# Altium PCB MergeBoard3.PcbDoc
Units mil, origin at the board's own origin, x right, y up, seen from the top; angles counter-clockwise.
Board outline 3000 x 3000 mil, 4 copper layers (Top Layer, Internal Plane 1, Internal Plane 2, Bottom Layer); 114 components, 68 nets, 382 pads, 119 vias.
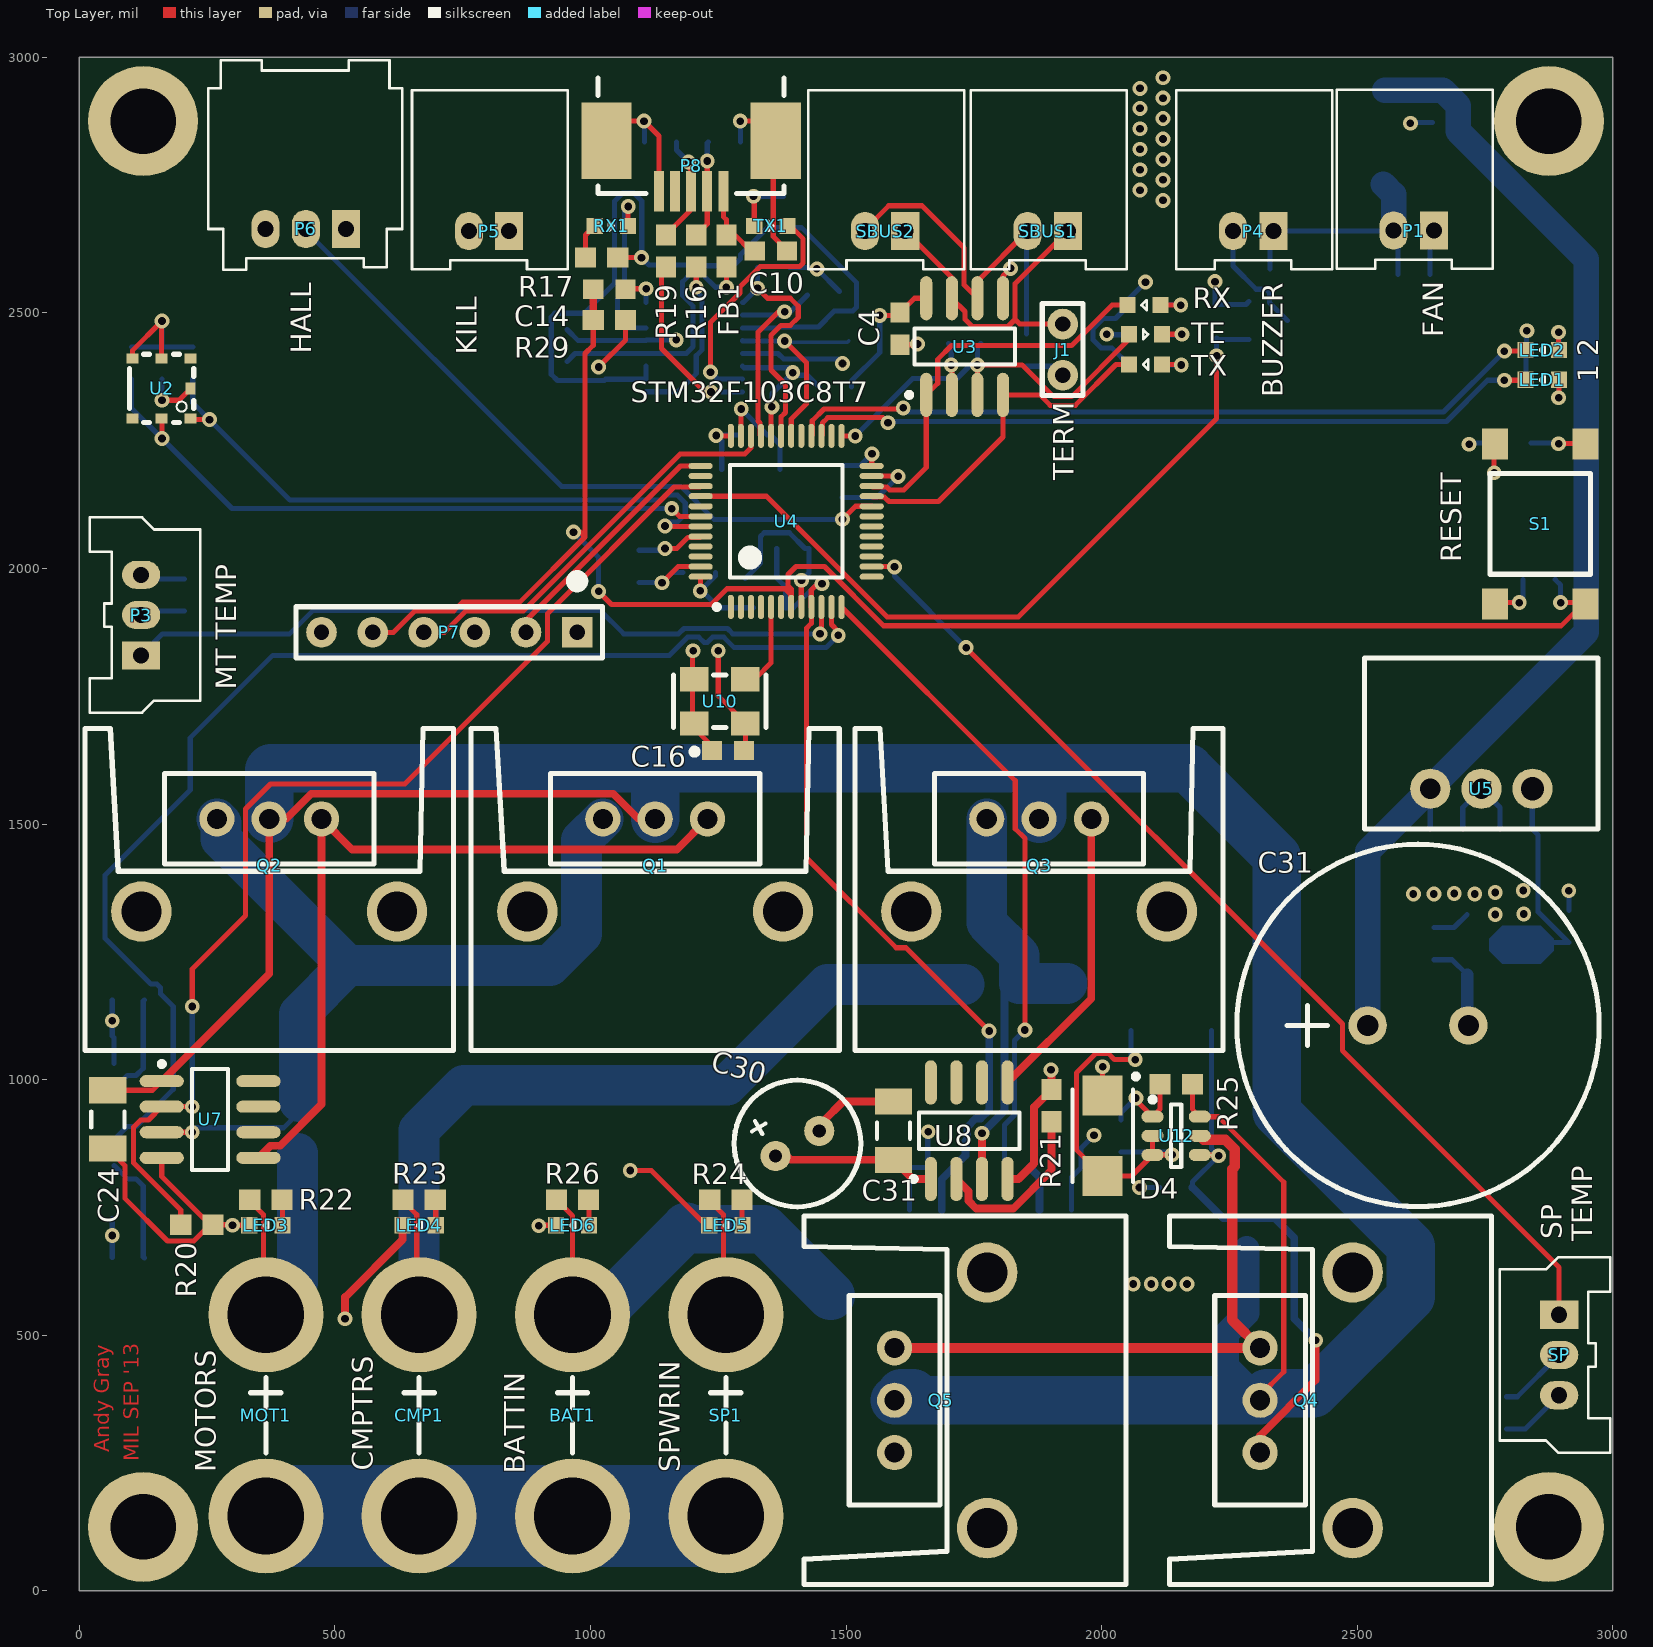
[diagram p0: Top Layer view]
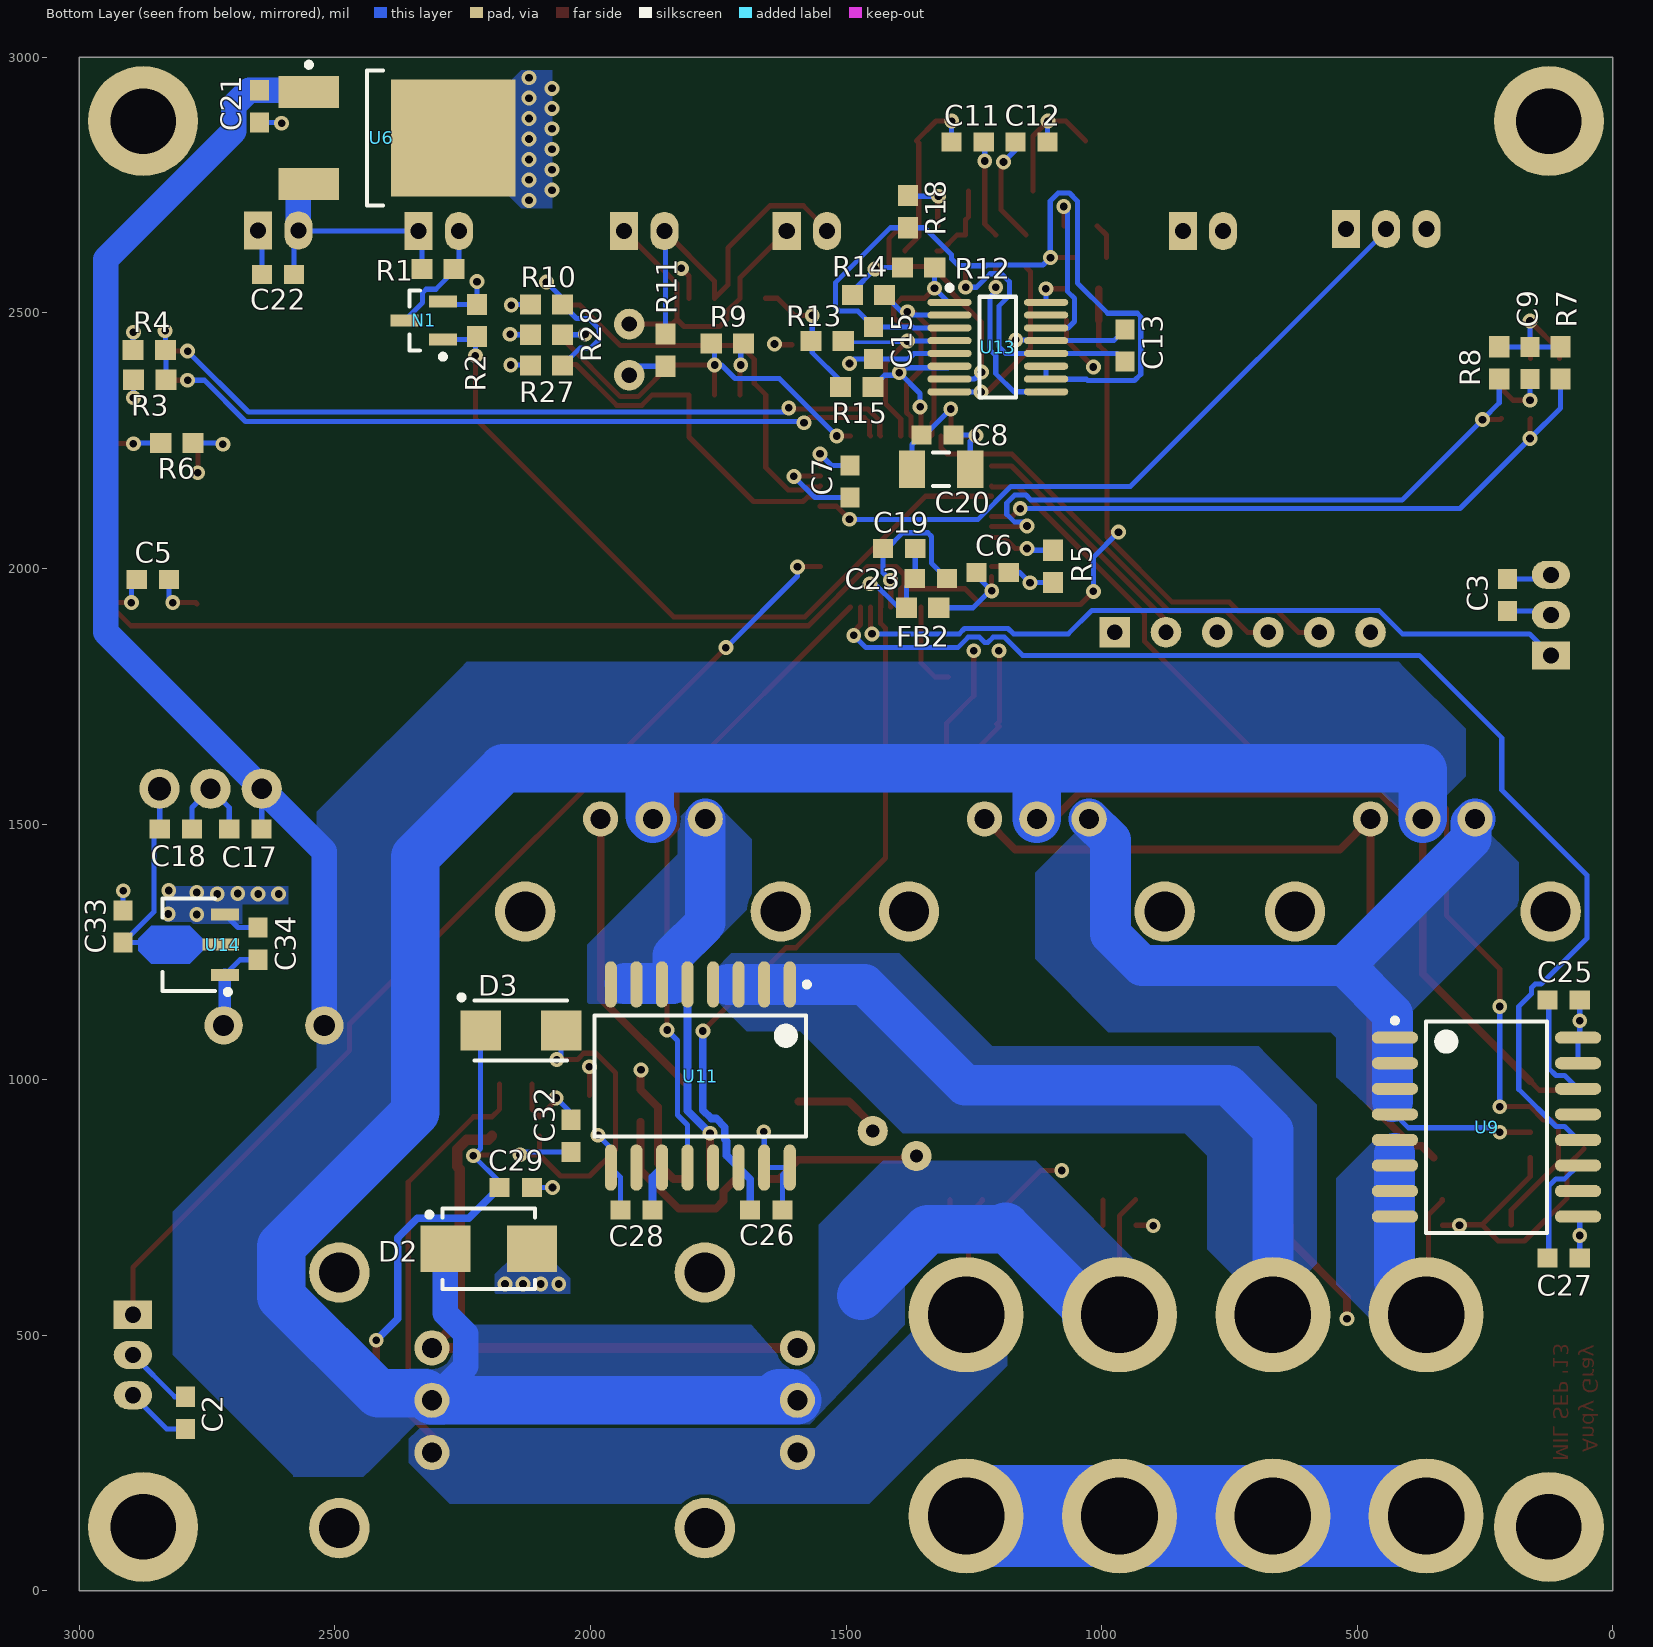
[diagram p1: Bottom Layer view, seen from below]
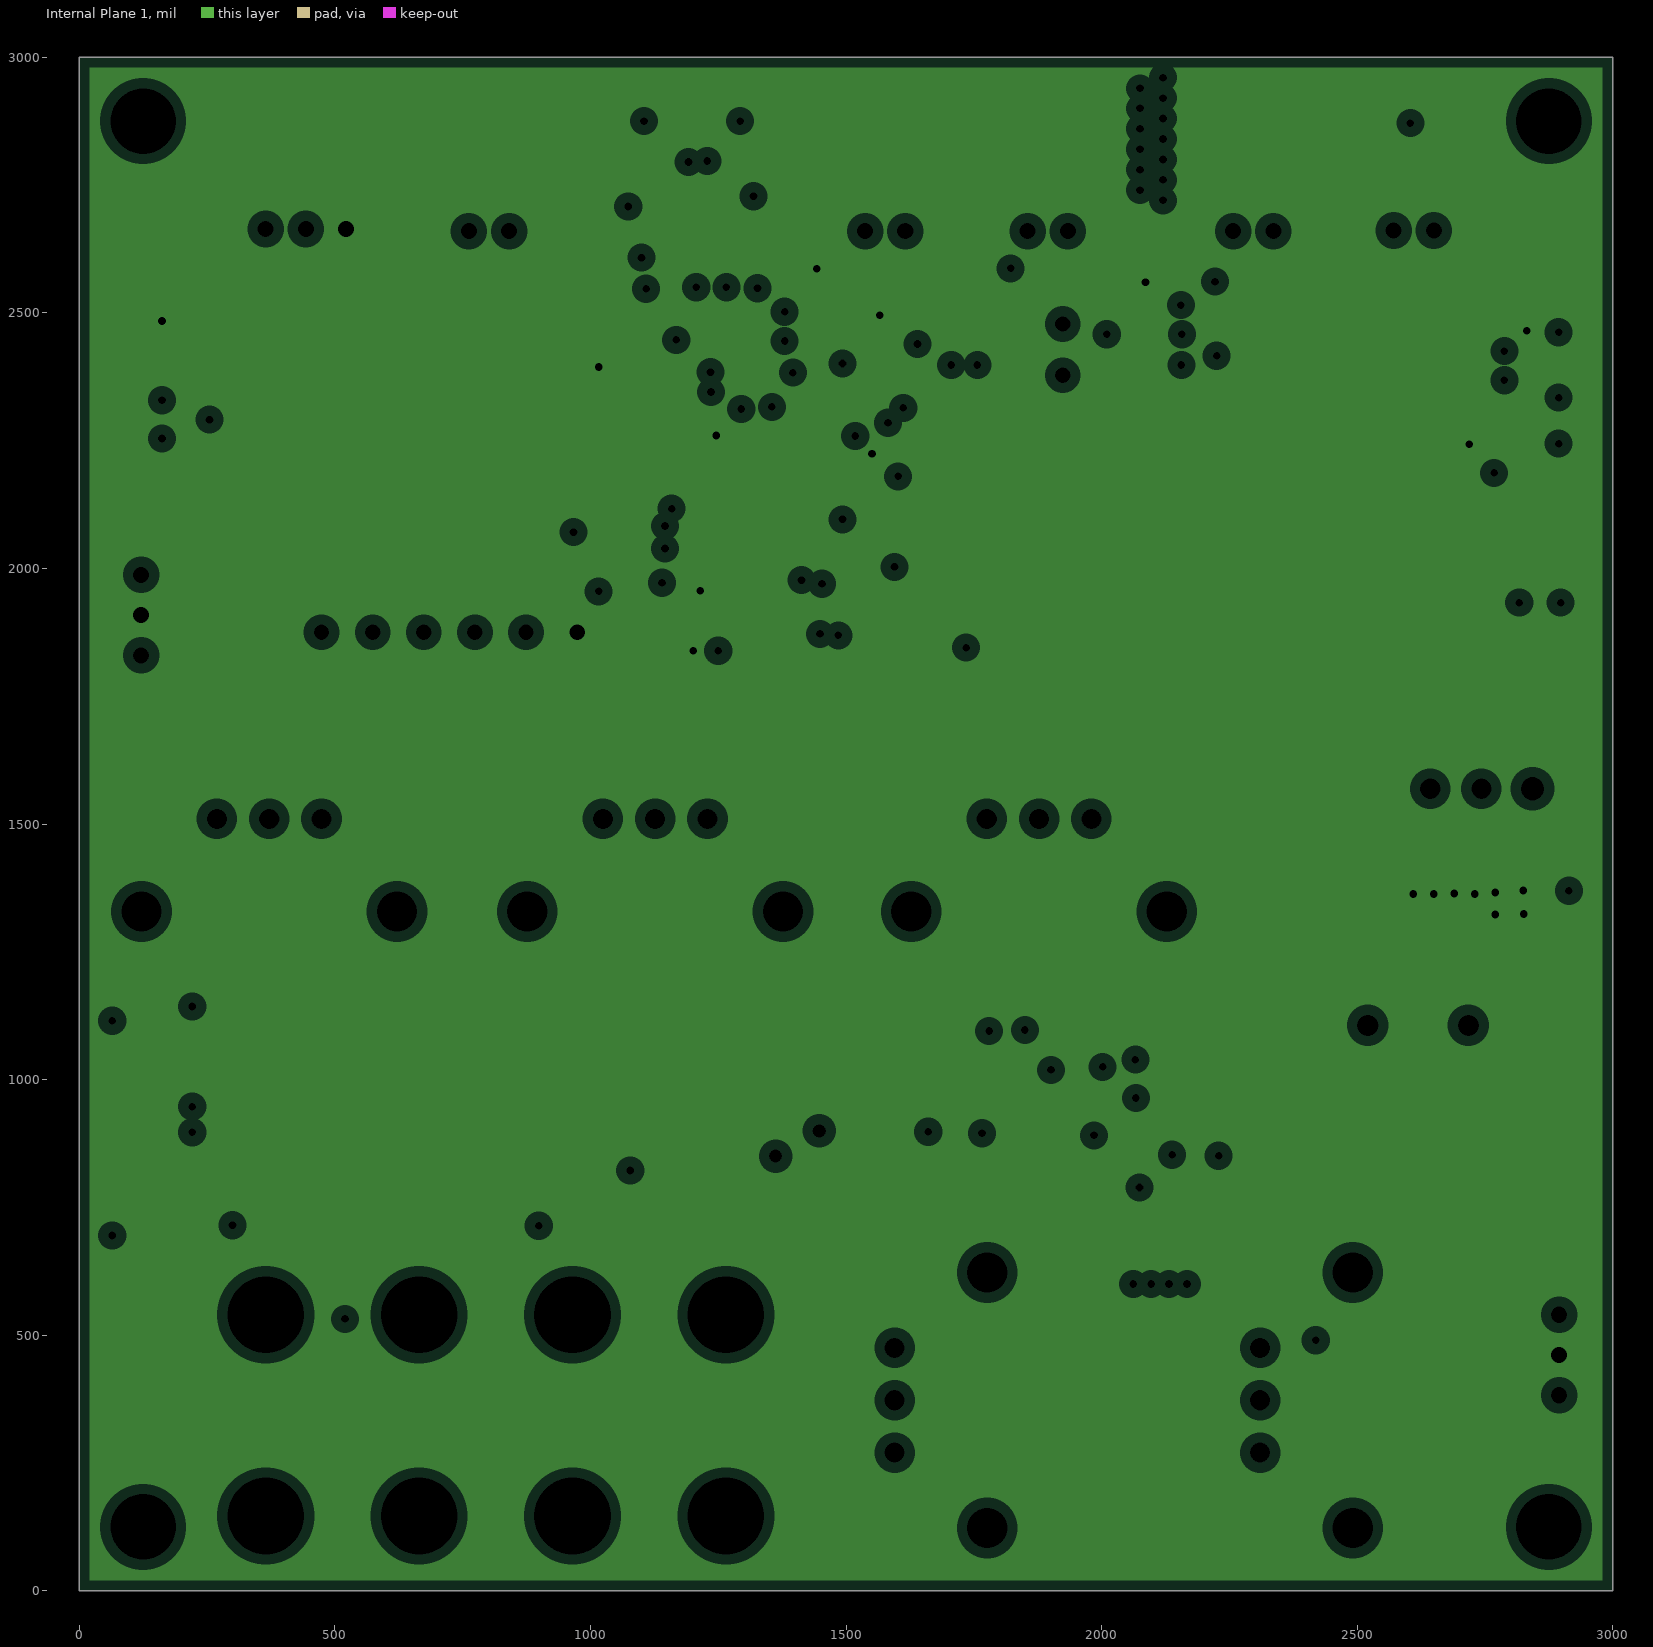
[diagram p2: Internal Plane 1, clearances drawn from the general rule]
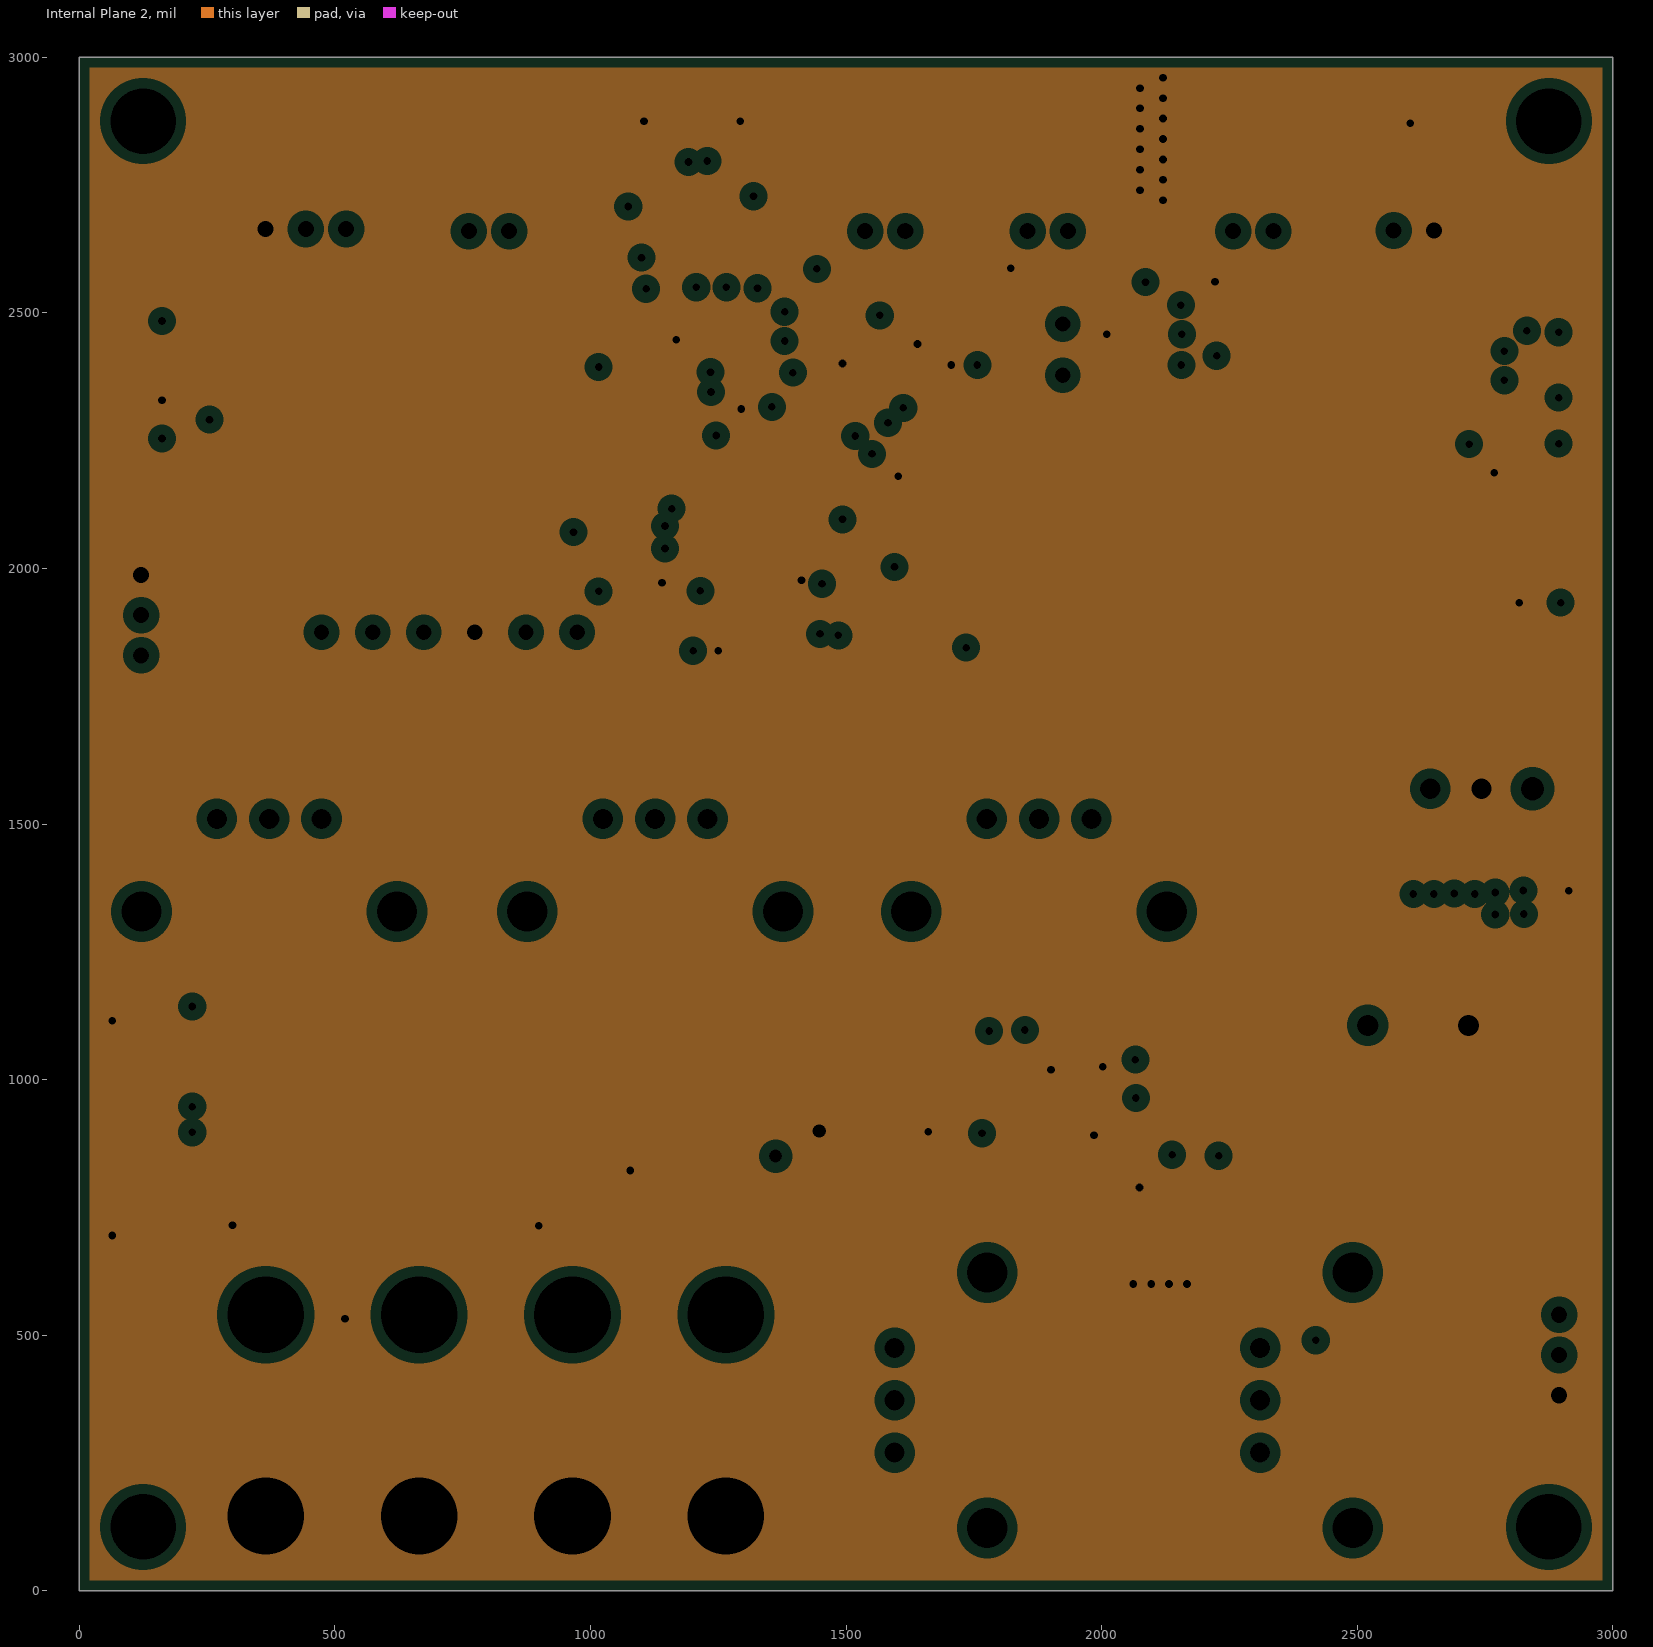
[diagram p3: Internal Plane 2, clearances drawn from the general rule]

## Layer stack, top to bottom
Top Layer: signal copper 1.4
Dielectric: core 12.6, FR-4, Dk 4.8
Internal Plane 1: plane copper 1.4, net 3V3
Dielectric: prepreg 12.6, FR-4, Dk 4.8
Internal Plane 2: plane copper 1.4, net GND
Dielectric: core 12.6, FR-4, Dk 4.8
Bottom Layer: signal copper 1.4

## Board outline
0,0 3000,0 3000,3000 0,3000

## Design rules (kind name [scope] priority, off if disabled: settings)
Clearance [All] p1: gap=7
Height [All] p1: minheight=0 maxheight=1500 prefheight=500
HoleSize [All] p1: absolutevalues=TRUE maxlimit=150 minlimit=15 maxpercent=80.000 minpercent=20.000
PlaneClearance [All] p1: clearance=20
PlaneConnect [All] p1: planeconnectstyle=Direct reliefexpansion=20 reliefentries=4 reliefconductorwidth=10 reliefairgap=10
PolygonConnect [All] p1: connectstyle=Direct reliefconductorwidth=10 reliefentries=4 polygonreliefangle="90 Angle" airgapwidth=10
RoutingVias [All] p1: holewidth=15 width=29 viastyle="Through Hole" minholewidth=15 minwidth=29 maxholewidth=40 maxwidth=100
SilkscreenOverComponentPads [IsPad] p1: minsilkscreentomaskgap=10
SolderMaskExpansion SolderMaskExpansion_1 [All] p1: expansion=4
SolderMaskExpansion "Negative Mask" [All] p2: expansion=-20
Width [All] p1: maxlimit=200 minlimit=7 preferedwidth=10
23 further rules are at their usual default settings.

## Classes and differential pairs
net class Blob: MOTORS MT_PW RAIL+ SHORE+
component class "Rail Station": BAT1 C29 C30 C31 C32 D2 D3 D4 LED5 LED6 Q4 Q5 R24 R25 R26 SP1 U12
component class Power: C17 C18 C19 C21 C22 C23 C33 C34 FB2 U5 U6 U14
component class PowerSplitter: C24 C25 C26 C27 C28 C31 CMP1 LED3 LED4 MOT1 Q1 Q2 Q3 R20 R21 R22 R23 U7 U8 U9 U11
component class CPU: C4 C5 C6 C7 C8 C9 C10 C11 C12 C13 C14 C15 C16 C20 FB1 J1 LED1 LED2 P7 P8 R3 R4 R5 R6 R7 R8 R9 R10 R11 R12 R13 R14 R15 R16 R17 R18 R19 R27 R28 R29 RX RX1 S1 SBUS1 SBUS2 TE TX TX1 U2 U3 U4 U10 U13
component class Attachments: C2 C3 N1 P1 P3 P4 P5 P6 R1 R2 SHPW

## Components (designator, comment, footprint, x,y, rotation, side; value= is the part's Value field where it differs from the comment)
BAT1 "BATWIRE" BATWIRE12 965,540 r270 top
C2 "Cap" CAPC0603 2792,348 r90 bottom
C3 "Cap" CAPC0603 206,1948 r270 bottom
C4 "Cap" CAPC0603 1606,2469 r90 top
C5 "Cap" CAPC0603 2856,1978 r180 bottom
C6 "Cap" CAPC0603 1213,1992 r180 bottom
C7 "Cap" CAPC0603 1492,2170 r270 bottom
C8 "Cap" CAPC0603 1321,2261 r0 bottom
C9 "Cap" CAPC0603 162,2402 r270 bottom
C10 "Cap" CAPC0603 1353,2621 r0 top
C11 "Cap" CAPC0603 1262,2834 r0 bottom
C12 "Cap" CAPC0603 1137,2834 r180 bottom
C13 "Cap" CAPC0603 954,2436 r90 bottom
C14 "Cap" CAPC0603 1037,2546 r180 top
C15 "Cap" CAPC0603 1446,2441 r270 bottom
C16 "Cap" CAPC0603 1269,1644 r0 top
C17 "Cap" CAPC0603 2675,1490 r0 bottom
C18 "Cap" CAPC0603 2811,1490 r180 bottom
C19 "Cap" CAPC0603 1396,2039 r0 bottom
C20 "Cap" CAPC1206 1314,2194 r180 bottom
C21 "Cap" CAPC0603 2647,2904 r270 bottom
C22 "Cap" CAPC0603 2611,2575 r0 bottom
C23 "Cap" CAPC0603 1334,1980 r180 bottom
C24 "Cap" CAPC1206 56,922 r90 top
C25 "Cap" CAPC0603 96,1156 r180 bottom
C26 "Cap" CAPC0603 1656,745 r180 bottom
C27 "Cap" CAPC0603 96,651 r180 bottom
C28 "Cap" CAPC0603 1910,745 r0 bottom
C29 "Cap" CAPC0603 2146,789 r180 bottom
C30 "CapPol" CAP22uF100V 1405,875 r30 top
C31 "Cap" CAPC1206 1593,900 r270 top
C31 "CapPol" CAP1000uF 2619,1106 r0 top (schematic designator 31)
C32 "Cap" CAPC0603 2038,890 r270 bottom
C33 "Cap" CAPC0603 2914,1299.5 r90 bottom
C34 "Cap" CAPC0603 2650,1266 r270 bottom
CMP1 "BATWIRE" BATWIRE12 665,540 r270 top
D2 "SMBJ60A-13-F" SMBJ60A-13-F 2199,669 r180 bottom
D3 "SS16T3G" SS16T3G 2136,1096 r180 bottom
D4 "SS16T3G" SS16T3G 2002,890 r270 top
FB1 "FBead" RES0603 1266,2621 r90 top
FB2 "FBead" RES0603 1350,1923 r180 bottom
J1 "Jumper" HEADER_MALE_1X2 1924,2378 r90 top
LED1 "LED" LED0603 2862,2369 r180 top
LED2 "LED" LED0603 2862,2427 r180 top
LED3 "LED" LED0603 365,715 r180 top
LED4 "LED" LED0603 665,715 r180 top
LED5 "LED" LED0603 1265,715 r180 top
LED6 "LED" LED0603 965,715 r180 top
MOT1 "BATWIRE" BATWIRE12 365,540 r270 top
N1 "NMOSFET" 2N7002P,215 2326,2485 r0 bottom
P1 "2-pin Horz Sherlock" MOLEX-HDR-1X2-SHERLOCK-HORZ 2650,2661 r0 top
P3 "MOLEX-HDR-1x3-SHERLOCK_VERT" MOLEX-HDR-1X3-SHERLOCK-VERT 121,1830 r270 top
P4 "2-pin Horz Sherlock" MOLEX-HDR-1X2-SHERLOCK-HORZ 2336,2660 r0 top
P5 "2-pin Horz Sherlock" MOLEX-HDR-1X2-SHERLOCK-HORZ 841,2660 r0 top
P6 "3pos RA sherlock connector" MOLEX-HDR-1X3-SHERLOCK-RA 522,2664 r0 top
P7 "SWD" SWD_STM32 974,1875 r270 top
P8 "UX60SC-MB-5ST" UX60SC-MB-5ST 1197,2738 r180 top
Q1 "IRFB3306PbF" "TO-220AB Heatsink Vertical" 1229,1510 r180 top
Q2 "IRFB3306PbF" "TO-220AB Heatsink Vertical" 474,1510 r180 top
Q3 "IRFB3306PbF" "TO-220AB Heatsink Vertical" 1980,1510 r180 top
Q4 "IRFB3306PbF" "TO-220AB Heatsink Vertical" 2310,475 r270 top
Q5 "IRFB3306PbF" "TO-220AB Heatsink Vertical" 1595,475 r270 top
R1 "Res" RES0603 2298,2586 r180 bottom
R2 "Res" RES0603 2222,2485 r90 bottom
R3 "Res" RES0603 2862,2369 r0 bottom
R4 "Res" RES0603 2863,2427 r0 bottom
R5 "Res" RES0603 1095,2004 r270 bottom
R6 "Res" RES0603 2809,2245 r0 bottom
R7 "Res" RES0603 102,2402 r270 bottom
R8 "Res" RES0603 222,2402 r270 bottom
R9 "Res" RES0603 1732,2440 r180 bottom
R10 "Res" RES0603 2086,2516 r0 bottom
R11 "Res" RES0603 1853,2427 r90 bottom
R12 "Res" RES0603 1358,2589 r180 bottom
R13 "Res" RES0603 1537,2445 r180 bottom
R14 "Res" RES0603 1456,2535 r180 bottom
R15 "Res" RES0603 1479,2355 r180 bottom
R16 "Res" RES0603 1207,2621 r270 top
R17 "Res" RES0603 1022,2608 r180 top
R18 "Res" RES0603 1379,2698 r90 bottom
R19 "Res" RES0603 1148,2621 r270 top
R20 "Res" RES0603 230,716 r0 top
R21 "Res" RES0603 1902,949 r90 top
R22 "Res" RES0603 365,765 r0 top
R23 "Res" RES0603 665,765 r0 top
R24 "Res" RES0603 1265,765 r0 top
R25 "Res" RES0603 2146,991 r180 top
R26 "Res" RES0603 965,765 r0 top
R27 "Res" RES0603 2086,2397 r0 bottom
R28 "Res" RES0603 2086,2457 r180 bottom
R29 "Res" RES0603 1037,2486 r180 top
RX "LED" LED0603 2083,2515 r180 top (schematic designator RX2)
RX1 "LED" LED0603 1041,2670 r0 top
S1 "Button" PTS645xxxxSMTR92 2858,2087 r90 top
SBUS1 "2-pin Horz Sherlock" MOLEX-HDR-1X2-SHERLOCK-HORZ 1934,2660 r0 top
SBUS2 "2-pin Horz Sherlock" MOLEX-HDR-1X2-SHERLOCK-HORZ 1616,2660 r0 top
SP "MOLEX-HDR-1x3-SHERLOCK_VERT" MOLEX-HDR-1X3-SHERLOCK-VERT 2895,540 r90 top (schematic designator P2)
SP1 "BATWIRE" BATWIRE12 1265,540 r270 top
TE "LED" LED0603 2086,2458 r0 top (schematic designator TE1)
TX "LED" LED0603 2086,2399 r180 top (schematic designator TX2)
TX1 "LED" LED0603 1353,2670 r0 top
U2 "BMP180" BMP180 161,2352 r270 top
U3 "ISL83485" ISL8348xIBZ 1732,2434 r90 top
U4 "STM32F103C8T7" STM32F103C8T7 1383,2092 r90 top
U5 "R-78C5.0-1.0" R-78C5.0-1.0 2643,1569 r0 top
U6 "MC78M12CDTG" MC78M12CDTG 2378,2842 r180 bottom
U7 "MIC5011" MIC5011 256,922 r0 top
U8 "MIC5011" MIC5011 1741,900 r90 top
U9 "ACS710" ACS710 247,907 r180 bottom
U10 "636L3C008M" 636L3C 1253,1740 r0 top
U11 "ACS710" ACS710 1785,1007 r270 bottom
U12 "LM5050-1" LM5050 2146,890 r0 top
U13 "FT230XS" FT230XS 1203,2433 r180 bottom
U14 "MCP1703AT" MCP1703AT-xx02EMB 2786,1264 r0 bottom

## Footprints (in the part's own frame and the unit in brackets; to place one, negate y for a bottom-side part, rotate by r counter-clockwise, add the part's x,y. Pads: shape width x height; smd on the part's side, far side on the other; paste and mask are expansions set on the pad)
2N7002P,215 [mm] "MOSFET N-CH SGL 60V SOT-23"
  rect 1.4x0.6 smd: 1(-0.95,0.95) 2(-0.95,-0.95) 3(0.95,0)
  silkscreen extent -1.07,-1.5 0.7,1.92, body extent -0.7,-1.5 0.7,1.5, height 1.1
636L3C [mm]
  rect 1.4x1.2 smd: 1(-1.27,-1.1) 2(1.27,-1.1) 3(1.27,1.1) 4(-1.27,1.1)
  silkscreen extent -2.3,-2.65 2.3,1.3, body extent -2.5,-1.6 2.5,1.6, height 2
ACS710 [mm] "SOIC, 16-Leads, Body 10.5x7.6mm (max), Pitch 1.27mm, IPC Medium Density"
  oval 2.3x0.6 smd: 1(-4.55,4.445) 2(-4.55,3.175) 3(-4.55,1.905) 4(-4.55,0.635) 5(-4.55,-0.635) 6(-4.55,-1.905) 7(-4.55,-3.175) 8(-4.55,-4.445) 9(4.55,-4.445) 10(4.55,-3.175) 11(4.55,-1.905) 12(4.55,-0.635) 13(4.55,0.635) 14(4.55,1.905) 15(4.55,3.175) 16(4.55,4.445)
  silkscreen extent -4.68,-5.25 3,5.42, body extent -3.8,-5.25 3.8,5.25, height 2.65
BATWIRE12 [mm] "Two 12AWG wires soldered directly to the board"
  round 5.715 hole 3.81: +(0,0) -(10,0)
  silkscreen extent 3.13,-0.75 6.87,0.75
BMP180 [mm]
  rect 0.5x0.6 smd: 1(-1.5,1.45) 2(-1.5,0) 3(-1.5,-1.45) 4(1.5,-1.45) 5(1.5,0) 6(1.5,1.45)
  rect 0.6x0.5 smd: 7(0,1.45)
  silkscreen extent -1.7,-1.6 1.7,1.6, body extent -1.9,-1.8 1.9,1.8, height 2
CAP22uF100V [mm] "CAP ALUM 22UF 100V 20% RADIAL"
  round 1.5 hole 0.65: 1(-1.25,0) 2(1.25,0)
  silkscreen extent -3.15,-3.15 3.15,3.15, body extent -3.12,-3.14 3.15,3.14, height 11.2
CAP1000uF [mm] "CAP ALUM 1000UF 50V 20% RADIAL"
  round 1.9 hole 1.05: 1(-2.5,0) 2(2.5,0)
  silkscreen extent -9,-9 9,9, body extent -8.93,-8.98 9,8.98, height 20
CAPC0603 [mm] "Chip Capacitor, 2-Leads, Body 1.60x0.80mm, IPC Medium Density"
  rect 1x0.95 smd: 1(-0.8,0) 2(0.8,0)
  body extent -0.88,-0.48 0.87,0.48, height 0.8
CAPC1206 [mm] "Chip Capacitor, 2-Leads, Body 3.20x1.60mm, IPC Medium Density"
  rect 1.3x1.85 smd: 1(-1.45,0) 2(1.45,0)
  silkscreen extent -0.4,-0.82 0.4,0.82, body extent -1.7,-0.9 1.7,0.9, height 1.8
FT230XS [mm] "SOP, 16-Leads, Body 4.90x3.90mm, Pitch 0.64mm, IPC Medium Density"
  oval 2.2x0.35 smd: 1(-2.4,2.223) 2(-2.4,1.588) 3(-2.4,0.953) 4(-2.4,0.318) 5(-2.4,-0.317) 6(-2.4,-0.952) 7(-2.4,-1.587) 8(-2.4,-2.222) 9(2.4,-2.223) 10(2.4,-1.588) 11(2.4,-0.953) 12(2.4,-0.318) 13(2.4,0.317) 14(2.4,0.952) 15(2.4,1.587) 16(2.4,2.222)
  silkscreen extent -2.53,-2.5 0.9,3.07, body extent -2,-2.5 2,2.5, height 1.76
HEADER_MALE_1X2 [mil]
  round 60 hole 30: 1(0,0) 2(100,0)
  silkscreen extent -40,-40 140,40
ISL8348xIBZ [mm] "SOIC, 8-Leads, Body 4.90x3.90mm, Pitch 1.27mm, IPC Medium Density"
  oval 2.2x0.6 smd: 1(-2.4,1.905) 2(-2.4,0.635) 3(-2.4,-0.635) 4(-2.4,-1.905) 5(2.4,-1.905) 6(2.4,-0.635) 7(2.4,0.635) 8(2.4,1.905)
  silkscreen extent -2.52,-2.5 0.9,2.88, body extent -2,-2.5 2,2.5, height 1.75
LED0603 [mm] "Chip LED, 2-Leads, Body 1.60x0.80mm, IPC Medium Density"
  rect 0.8x0.8 smd: A(-0.825,0) C(0.825,0)
  silkscreen extent -0.13,-0.25 0.12,0.25, body extent -0.88,-0.48 0.87,0.47, height 0.8
LM5050 [mm] "SOT23, 6-Leads, Body 2.90x2.80mm, Pitch 0.95mm, IPC Medium Density"
  oval 1.1x0.6 smd: 1(-1.175,0.95) 2(-1.175,0) 3(-1.175,-0.95) 4(1.175,-0.95) 5(1.175,0) 6(1.175,0.95)
  silkscreen extent -1.3,-1.55 0.25,1.92, body extent -0.87,-1.52 0.88,1.53, height 1.1
MC78M12CDTG [mm] "IC REG LDO 12V 0.5A DPAK"
  rect 3x1.6 smd: 1(-4.39,2.29) 3(-4.39,-2.29)
  rect 6.2x5.8 smd: 2(2.79,0)
  silkscreen extent -4.52,-3.35 -0.71,3.76, body extent -1.5,-3.37 4.72,3.37, height 2.38
MCP1703AT-xx02EMB [mm] "SOT89, 3-Leads, Body 4.49x2.45mm, Pitch 1.50mm, Lead Span 4.1mm, IPC Medium Density"
  rect 1.4x0.6 smd: 1(-1.8,1.5) 3(-1.8,-1.5)
  rect 1.8x0.6 smd: 2(-1.6,0)
  Top Layer region: -0.7,0.3 -0.05,0.95 1.85,0.95 2.5,0.3 2.5,-0.3 1.85,-0.95 -0.05,-0.95 -0.7,-0.3
  silkscreen extent -2.08,-2.3 1.3,2.47, body extent -1.3,-2.3 1.3,2.3, height 1.6
MIC5011 [mm] "SOIC, 8-Leads, Body 4.90x3.90mm, Pitch 1.27mm, IPC Medium Density"
  oval 2.2x0.6 smd: 1(-2.4,1.905) 2(-2.4,0.635) 3(-2.4,-0.635) 4(-2.4,-1.905) 5(2.4,-1.905) 6(2.4,-0.635) 7(2.4,0.635) 8(2.4,1.905)
  silkscreen extent -2.52,-2.5 0.9,2.88, body extent -2,-2.5 2,2.5, height 1.63
MOLEX-HDR-1X2-SHERLOCK-HORZ [mm]
  rect 1.397x1.905 hole 0.8: 1(0,0)
  oval 1.397x1.905 hole 0.8: 2(-2,0)
  silkscreen extent -4.83,-1.91 2.92,6.98, body extent -4.83,-1.91 2.87,8.59, height 5.54
MOLEX-HDR-1X3-SHERLOCK-RA [mm]
  rect 1.397x1.905 hole 0.8: 1(0,0)
  oval 1.397x1.905 hole 0.8: 2(-2,0) 3(-4,0)
  silkscreen extent -6.86,-2.03 2.79,8.38, body extent -6.88,-1.99 2.82,8.51, height 5.75
MOLEX-HDR-1X3-SHERLOCK-VERT [mm]
  rect 1.397x1.905 hole 0.8: 1(0,0)
  oval 1.397x1.905 hole 0.8: 2(-2,0) 3(-4,0)
  silkscreen extent -6.85,-2.55 2.85,2.95, body extent -6.88,-2.57 2.82,2.98, height 8.57
PTS645xxxxSMTR92 [mm] "PTS645 Series SMT 6 mm Tactile Switch"
  rect 1.555x1.3 smd: A(-3.975,2.25) A(3.975,2.25) B(-3.975,-2.25) B(3.975,-2.25)
  silkscreen extent -2.5,-2.5 2.5,2.5, body extent -3,-3 3,3, height 4.5
R-78C5.0-1.0 [mm] "CONV DC/DC 1A 5V OUT SIP VERT"
  round 2 hole 1: 1(0,0) 2(2.54,0)
  round 2 hole 1.15: 3(5.08,0)
  silkscreen extent -3.26,-2 8.34,6.5, body extent -3.2,-1.9 8.3,6.5, height 10.8
RES0603 [mm] "Chip Resistor, 2-Leads, Body 1.60x0.80mm, IPC Medium Density"
  rect 1.05x1 smd: 1(-0.8,0) 2(0.8,0)
  body extent -0.88,-0.48 0.87,0.47, height 0.8
SMBJ60A-13-F [mm] "TVS UNIDIRECT 600W 60V SMB"
  rect 2.5x2.3 smd: A(2.15,0) C(-2.15,0)
  silkscreen extent -3.08,-2 2.3,2, body extent -2.29,-1.97 2.28,1.97, height 2.62
SS16T3G [mm] "DIODE SCHOTTKY 60V 1A SMA"
  rect 2x2 smd: A(2,0) C(-2,0)
  silkscreen extent -3.08,-1.5 2.3,1.77, body extent -2.29,-1.46 2.28,1.46, height 2.2
STM32F103C8T7 [mm] "MCU ARM 32BIT 64K FLASH 48-LQFP"
  oval 1.2x0.3 smd mask+0.07: 1(-4.25,2.75) 2(-4.25,2.25) 3(-4.25,1.75) 4(-4.25,1.25) 5(-4.25,0.75) 6(-4.25,0.25) 7(-4.25,-0.25) 8(-4.25,-0.75) 9(-4.25,-1.25) 10(-4.25,-1.75) 11(-4.25,-2.25) 12(-4.25,-2.75) 25(4.25,-2.75) 26(4.25,-2.25) 27(4.25,-1.75) 28(4.25,-1.25) 29(4.25,-0.75) 30(4.25,-0.25) 31(4.25,0.25) 32(4.25,0.75) 33(4.25,1.25) 34(4.25,1.75) 35(4.25,2.25) 36(4.25,2.75)
  oval 0.3x1.2 smd mask+0.07: 13(-2.75,-4.25) 14(-2.25,-4.25) 15(-1.75,-4.25) 16(-1.25,-4.25) 17(-0.75,-4.25) 18(-0.25,-4.25) 19(0.25,-4.25) 20(0.75,-4.25) 21(1.25,-4.25) 22(1.75,-4.25) 23(2.25,-4.25) 24(2.75,-4.25) 37(2.75,4.25) 38(2.25,4.25) 39(1.75,4.25) 40(1.25,4.25) 41(0.75,4.25) 42(0.25,4.25) 43(-0.25,4.25) 44(-0.75,4.25) 45(-1.25,4.25) 46(-1.75,4.25) 47(-2.25,4.25) 48(-2.75,4.25)
  silkscreen extent -4.37,-2.8 2.8,3.57, body extent -3.5,-3.5 3.5,3.5, height 1.6
SWD_STM32 [mil] "SWD connector matching the pinout on STM Discovery Boards"
  rect 60x60 hole 30: 1(0,0)
  round 60 hole 30: 2(0,-100) 3(0,-200) 4(0,-300) 5(0,-400) 6(0,-500)
  silkscreen extent -110,-550 50,50
"TO-220AB Heatsink Vertical" [mm] "Vertical Heatsink for better heat management"
  round 3 hole 2: 0(-3.75,4.6) 0(8.95,4.6)
  round 1.75 hole 1: D(2.6,0) G(0,0) S(5.2,0)
  silkscreen extent -6.55,-4.5 11.75,11.5, body extent -6.48,-4.45 11.81,11.56, height 30.5
UX60SC-MB-5ST [mm] "USB Mini-B Recepticle"
  rect 0.5x2 smd: 1(-1.6,0) 2(-0.8,0) 3(0,0) 4(0.8,0) 5(1.6,0)
  rect 2.5x3.8 smd: SHD(-4.2,-2.5) SHD(4.2,-2.5)
  silkscreen extent -4.62,-5.63 4.62,0.13, body extent -4.9,-6.61 4.9,0.39, height 3.95

## Part data
BAT1 CMP1 MOT1 SP1: "Two large gauge leads soldered directly to the board."
D2: "TVS UNIDIRECT 600W 60V SMB"
D3 D4: "DIODE SCHOTTKY 60V 1A SMA"
FB1 FB2: "Ferrite Bead"
J1: "Single Jumper on 1x2 Male Header"
N1: "NMOSFET Template"
P1 P4 P5 SBUS1 SBUS2: library part MOLEX-HDR-1x2-SHERLOCK_RA, "Header, Molex, 2mm Pitch Sherlock Header, Single Row, Horizontal, 2 Circuits, Length 3.3mm,  0353630260"
P3 SP: "Header, Molex, 2mm Pitch Sherlock Header, Single Row, Vertical, 3 Circuits, Length 3.3mm, 0353620376"
P6: library part MOLEX-HDR-1x3-SHERLOCK_RA, "Header, Molex, 2mm Pitch Sherlock Header, Single Row, Right Angle 3 Circuits, Length 3.3mm"
P7: library part SWD_STM32, "SWD connector matching the pinout on STM Discovery Boards"
P8: "USB Mini B Metal Shield SMT"
Q1 Q2 Q3 Q4 Q5: library part IRFx3306PbF, "HEXFET Power MOSFET"
S1: "SPST Button"
U2: "Digital Pressure Sensor"
U3: "3.3V RS485 Transceiver"
U4: "MCU ARM 32BIT 64K FLASH 48-LQFP"
U5: "CONV DC/DC 1A 5V OUT SIP VERT"
U6: "IC REG LDO 12V 0.5A DPAK"
U7 U8: "Minimum Parts High- or Low-Side MOSFET Driver"
U9 U11: "Current Sensor with Integrated Overcurrent Detection"
U10: library part 636L3C, "HCMOS/TTL Clock Oscillator"
U12: library part LM5050, "High-Side OR-ing FET Controller"
U13: "USB To Basic UART IC"
U14: "250 mA, 16V, Low Quiescent Current LDO Regulator"

## Free pads (board coordinates)
  round 215 hole 128.5 mask-25: 1(125,125) 1(125,2875) 1(2875,125) 1(2875,2875)

## Via types
v1: diameter 29, hole 15, Top Layer to Bottom Layer, tented both sides, 118 vias
v2: diameter 29, hole 15, Top Layer to Bottom Layer, 1 vias

## Nets (pads, with @x,y where several pads share a name; then routed paths per layer and width w, separated by ;. In a path a pad name is that pad's centre, name@x,y a point inside that pad or via, vN(x,y) a via of type N, cw(c..) or ccw(c..) an arc to the next point about the centre after c; other vN are vias at no path point)
3V3: C2.2 C3.2 C4.2 C6.1 C7.1 C8.1 C9.1 C16.1 C20.2 C34.1 FB2.2 P3.2 P6.1 P7.1 R3.1 R4.1 R6.1 R7.1 R8.1 R10.1 R12.1 R13.1 R14.1 R15.1 R27.1 R29.1 SP.2 U2.2 U2.3 U3.8 U4.24 U4.36 U4.48 U10.1 U10.4 U14.3 | length 2184.3
  Top Layer w10: U2.3 103.91,2425.91 v1@161,2483 ; U2.2 v1@161,2483 ; v1(162,2484) v1@161,2483 ; v1(1016,2394) 1068.5,2446.5 R29.1 ; U10.1@1200,1690.5 C16.1@1240.5,1650 ; v1(1201,1839) 1200,1838 1200,1787.31 1200,1700.69 U10.1@1205.09,1695.6 ; v1(1215,1956) 1215,1983.06 U4.48 ; v1@1246.68,2259.32 U4.36 ; U4.24 1550.32,2223.32 v1(1551,2224) ; v1(1566,2495) 1600.5,2495 C4.2 1633.99,2528.49 U3.8
  Bottom Layer w10: R7.1 C9.1 ; P3.2 128.76,1916.5 C3.2 ; v1(162,2484) C9.1 ; R8.1 C9.1 ; C6.1 1244.5,1985.5 v1(1215,1956) 1218.56,1956 1251.56,1923 FB2.2 ; C20.2 1256.91,2249.09 v1(1246,2260) 1247,2261 C8.1 ; R12.1 v1@1440,2589 ; v1(1443,2586) R14.1@1487.5,2541.5 ; C7.1 1528.5,2201.5 v1(1551,2224) ; R15.1 1510.5,2366.5 1566,2422 v1(1566,2495) ; R27.1 2020,2431.5 1999.02,2431.5 1983.5,2447.02 1983.5,2468.98 2003.21,2488.69 2027.19,2488.69 R10.1 2054.5,2528.5 v1(2086,2560) ; C34.1 2689.57,1297.5 U14.3 ; v1(2719,2243) 2721,2245 R6.1 ; C2.2 2813.24,379.5 SP.2 ; R3.1 2830.5,2426 R4.1 2831.5,2463.5 2831,2464 v1(2832,2465)
  other v1: 2770,1323 2826,1324 2610,1363 2650,1363 2730,1363 2690,1364 2770,1366 2825,1370
12V: C22.1 P1.2 P4.1 R1.1 U6.3 | length 489.4
  Bottom Layer w10: R1.1 2329.5,2653.5 P4.1 2570.26,2660 P1.2 ; C22.1 P1.2@2579.5,2652.76
  Bottom Layer w50: U6.3 2571.26,2731.42 P1.2
A3V3: C19.1 C23.1 C26.1 FB2.1 U4.9 U11.14 | length 1656.2
  Top Layer w10: U4.9@1432,1924.89 1432,1958 v1@1449,1975 ; U4.9 1432.21,1892.69 1422.5,1882.98 1422.5,1433.55 1598.21,1257.84 1617.16,1257.84 v1(1780,1095)
  Bottom Layer w10: C19.1 1364.5,1980.99 C23.1 1381.5,1964 FB2.1 1397,1923 v1@1449,1975
  Bottom Layer w15: C26.1 1687.5,805.36 U11.14 1733.69,851.56 1733.69,879.68 1737,882.99 1737,907.01 1753.99,924 1763.89,924 1780,940.11 v1(1780,1095)
  other v1: 1453,1970
BOOT0: R5.1 U4.44 | length 131.9
  Top Layer w10: v1(1146,2039) 1168.85,2039 1190.54,2060.69 1213.9,2060.69 U4.44
  Bottom Layer w10: R5.1 1142.5,2035.5 v1(1146,2039)
BUZ_EN: N1.1 R2.1 U4.40 | length 1490.3
  Top Layer w10: U4.40 1344.31,2141.21 1580.62,1904.89 1836.89,1904.89 2225,2293 v1(2225,2416)
  Bottom Layer w10: v1(2225,2416) 2225,2450.5 2227.91,2447.6 N1.1
CLK8MHZ: U4.5 U10.3 | length 174.3
  Top Layer w10: U10.3@1300,1787.31 1325.31,1787.31 1353.47,1815.47 U4.5
CM_PW: Q3.S U8.3 U11.5 U11.6 U11.7 U11.8 | length 845.9
  Top Layer w15: U8.3 v1(1766,895) v1@1770,899
  Bottom Layer w15: v1(1766,895) 1810,939 U11.5
  Bottom Layer w80: Q3.S 1775.28,1306.72 1839,1243 1839,1188 1932,1188
CMP_EN: R21.1 U8.2 | length 346.7
  Top Layer w15: U8.2 1739.69,781.82 1739.69,763.12 1755.1,747.7 1826.9,747.7 1902,822.81 R21.1
CMP_I: U4.12 U11.12 | length 1262
  Top Layer w10: U4.12 1831.19,1584.76 1831.19,1490.76 1850,1471.95 v1(1850,1097)
  Bottom Layer w10: U11.12 1810,911.42 1829.5,930.92 1829.5,1076.5 v1(1850,1097)
COMP: CMP1.+ R23.1 U11.1 U11.2 U11.3 U11.4 | length 1783.1
  Top Layer w10: R23.1 633.5,762.48 660.27,735.72 660.27,544.73 CMP1.+
  Bottom Layer w80: CMP1.+ 665,901 753,989 1267,989 1464,1186 1731,1186
DEBUG_CTS: R15.2 U4.32 U13.6 | length 294.6
  Top Layer w10: U4.32 1353.47,2314.47 v1(1355,2316)
  Bottom Layer w10: U13.6 1300.48,2392.5 v1@1386.5,2392.5 ; v1(1355,2316) 1355,2342 v1(1396,2383) 1401.18,2377.82 1424.69,2377.82 R15.2
DEBUG_RTS: R14.2 U4.33 U13.2 | length 414
  Top Layer w10: U4.33 1332.01,2261.1 1332.01,2284.46 1328,2288.46 1328,2462 1368,2502 v1(1380,2502)
  Bottom Layer w10: U13.2 1370.5,2495.5 v1@1377,2502 ; v1(1380,2502) 1391.5,2502 R14.2
DEBUG_RXI: R12.2 U4.31 U13.1 | length 477.3
  Top Layer w10: v1(1327,2548) 1346.5,2528.5 1390.98,2528.5 1406.5,2512.98 1406.5,2491.02 1390.98,2475.5 1373.02,2475.5 1353.5,2455.98 1353.5,2388.02 1381.5,2360.02 1381.5,2305.02 1373.16,2296.68 U4.31
  Bottom Layer w10: U13.1 1299.5,2520.5 v1(1327,2548) 1327,2588.5 R12.2
DEBUG_TXO: R13.2 U4.30 U13.4 | length 426
  Top Layer w10: v1(1380,2445) 1422.5,2402.5 1422.5,2321.98 1392.84,2292.32 U4.30
  Bottom Layer w7: v1(1380,2445) 1382.69,2442.31 1502.82,2442.31 R13.2
  Bottom Layer w10: U13.4 1297.99,2445 v1(1380,2445)
GND: BAT1.- C2.1 C3.1 C4.1 C5.2 C6.2 C7.2 C8.2 C9.2 C10.2 C11.2 C12.2 C13.2 C15.2 C16.2 C17.2 C18.2 C19.2 C20.1 C21.2 C22.2 C23.2 C24.1 C25.2 C26.2 C27.2 C28.2 C29.2 C30.2 C31.1@1593,957.09 C31.2@2717.43,1106 C33.2 C34.2 CMP1.- D2.A D4.C LED3.C LED4.C LED5.C LED6.C MOT1.- N1.2 P1.1 P3.3 P6.3 P7.3 P8.5 P8.SHD R2.2 R5.2 R9.2 R20.2 R21.2 R28.2 S1.A SP1.- SP.3 U2.7 U3.2 U3.5 U4.8 U4.23 U4.35 U4.47 U5.2 U6.2 U7.4 U8.4 U9.9 U9.15 U9.16 U10.2 U11.9 U11.15 U11.16 U13.5 U13.13 U14.1 | length 6545.5
  Top Layer w10: C24.1 89.2,831.71 89.2,767.97 172.86,684.31 224.14,684.31 R20.2@255.83,716 ; U7.4 161.51,810.32 R20.2@255.83,716 ; v1(162,2329) 195.09,2329 U2.7 ; LED3.C v1(300,715) 299,716 R20.2 R20.2@255.83,716 ; v1(899,714) 900,715 LED6.C ; P8.SHD@1031.65,2836.43 1070.22,2875 v1(1105,2875) 1134.01,2845.99 P8.5 ; v1(1078,822) 1119.18,822 1226.18,715 LED5.C ; v1(1140,1972) 1171.42,2003.42 U4.47 ; v1(1250,1839) 1250,1750.69 U10.2@1300,1700.69 ; v1(1293,2875) 1323.78,2875 1362.35,2836.43 1357.73,2831.8 1357.73,2649.28 1384.5,2622.52 C10.2 ; U4.35 1294.42,2311.42 v1(1295,2312) ; C16.2@1303.5,1650 U10.2@1303.5,1697.2 ; U4.8 1412.53,1976.53 v1(1413,1977) ; U4.23 1601.42,2180.58 v1(1602,2180) ; C4.1 1638.5,2437.5 v1(1640,2439) ; v1(1706,2398) 1707,2397 U3.2 ; U3.5 1807,2572 v1(1822,2587) ; D4.C v1(2002,1025) ; v1(2768,2187) 2768,2242.08 S1.A@2769.42,2243.5 ; S1.A@2769.42,1930.5 2771.91,1933 v1(2817,1933)
  Top Layer w15: v1(520,532) 520,574.61 632.52,687.12 LED4.C ; C30.2@1455.8,918.8 1494.09,957.09 C31.1@1593,957.09 ; U8.4 1837.49,805.51 1867.81,835.84 1867.81,946.31 R21.2 1902,1018 v1(1901,1019)
  Bottom Layer w10: C27.2@64.5,652 U9.9@64.5,728.64 ; C25.2 64.5,1085.36 U9.16 U9.15 ; P3.3 128.98,1979.5 C3.1 ; v1(162,2329) C9.2 ; C13.2 976,2445.5 U13.13 ; R5.2 v1@1139.5,1972.5 ; v1(1105,2875) 1105.5,2874.5 C12.2 ; U13.13@1110.01,2447 v1(1168,2447) ; v1(1140,1972) 1160,1992 C6.2 ; v1(1293,2875) 1293.5,2874.5 C11.2 ; v1(1295,2312) 1346,2261 C8.2 1371.09,2242.41 C20.1 ; U13.5 1367.02,2420.5 1378.02,2409.5 C15.2 1484.5,2409.5 v1(1493,2401) ; C23.2 1332.82,2010.31 1332.82,2062.67 1339.85,2069.7 1389.16,2069.7 1419.86,2039 C19.2 1427.5,1991.5 v1(1413,1977) ; C7.2 1560.5,2138.5 v1(1602,2180) ; C26.2 1624.5,813.36 U11.16 U11.15 1660,897 v1(1661,898) ; R9.2 1706,2434.5 v1(1706,2398) ; C28.2 1941.5,809.36 U11.9 1960,866 v1(1985,891) ; v1@2011,2457 R28.2 ; v1(2074,789) C29.2 ; v1(2222,2561) R2.2 2282.69,2516.5 N1.2 ; v1@2605.5,2872.5 C21.2 ; C22.2 P1.1@2642.5,2653.5 ; C34.2 2685.57,1234.5 U14.1 ; C17.2 2706.5,1532.5 U5.2 2779.5,1532.5 C18.2 ; C2.1 2828.98,316.5 SP.3 ; v1(2817,1933) 2824.5,1940.5 C5.2 ; C33.2 v1(2914,1369.5)
  Bottom Layer w20: C31.2@2715.13,1108.29 C31.2@2717.43,1106
  Bottom Layer w25: C31.2@2715.13,1108.29 U14.1
  Bottom Layer w200: MOT1.- CMP1.- BAT1.- SP1.-
  other v1: 2062,600 2097,600 2132,600 2167,600 64.5,695 64.5,1115 2010,2458 2120,2720 2075,2740 2120,2760 2075,2780 2120,2800 2075,2820 2120,2840 2075,2860 2604,2871 2120,2880 2075,2900 2120,2920 2075,2939 2120,2960
I2C_SCL: R7.2 U2.5 U4.42 | length 1297.4
  Top Layer w10: U2.5 162,2291.94 v1(162,2254) ; v1(1159,2117) 1174.16,2101.84 U4.42
  Bottom Layer w10: R7.2 102,2314 v1(162,2254) 299,2117 v1(1159,2117)
I2C_SDA: R8.2 U2.6 U4.43 | length 1277.8
  Top Layer w10: U2.6 220.03,2291 v1(255,2291) ; v1(1146,2083) 1146.84,2082.16 U4.43
  Bottom Layer w10: R8.2 222,2324 v1(255,2291) 412,2134 1138.52,2134 1148.02,2143.5 1169.98,2143.5 1185.5,2127.98 1185.5,2106.02 1169.98,2090.5 1153.5,2090.5 v1(1146,2083)
LED1: LED1.C U4.27 | length 1445
  Top Layer w10: U4.27 1453.68,2261.1 1453.68,2284.46 1464.17,2294.95 1572.05,2294.95 v1(1582,2285) ; v1(2788,2368) 2828.52,2368 LED1.C
  Bottom Layer w10: v1(1582,2285) 1584.5,2287.5 2674.54,2287.5 2755.04,2368 v1(2788,2368)
LED2: LED2.C U4.28 | length 1489.6
  Top Layer w10: U4.28 1433.99,2261.1 1433.99,2288.81 1457.12,2311.95 1609.95,2311.95 v1(1612,2314) ; v1(2788,2425) 2827.52,2425 LED2.C
  Bottom Layer w10: v1(1612,2314) 1620,2306 2669,2306 v1(2788,2425)
MOT_EN: R20.1 U4.39 U7.2 | length 2169.6
  Top Layer w10: R20.1 198.5,744.84 106.2,837.14 106.2,906.86 120.15,920.81 135.32,920.81 U7.2 v1(221,947) ; v1(221,1143) 221,1216.48 325.19,1320.67 325.19,1529.24 374.4,1578.45 636.85,1578.45 916,1857.6 916,1911.48 1163.64,2159.12 1213.9,2159.12 U4.39
  Bottom Layer w10: v1(221,947) v1(221,1143)
MOT_I: U4.11 U9.12 | length 2406.5
  Top Layer w10: U4.11 1471.58,1890.42 1485,1877 v1(1485,1869)
  Bottom Layer w10: U9.12 94.06,908.19 111.19,908.19 184,981 184,1143 159.18,1167.82 159.18,1179.67 152.15,1186.7 140.3,1186.7 50.58,1276.42 50.58,1399.95 217.28,1566.65 217.28,1668.5 378.78,1830 1154.52,1830 1190.02,1865.5 1211.98,1865.5 1222.48,1855 1228.52,1855 1239.02,1865.5 1260.98,1865.5 1281.48,1845 1461,1845 v1@1480,1864
MOTORS: MOT1.+ R22.1 U9.5 U9.6 U9.7 U9.8 | length 579.7
  Top Layer w10: R22.1 333.5,762.48 360.27,735.72 360.27,544.73 MOT1.+
  Bottom Layer w80: MOT1.+ 427,602 427,856
MT_PW: Q1.S Q2.S U7.3 U9.1 U9.2 U9.3 U9.4 | length 1702.6
  Top Layer w10: U7.3 v2(221,897)
  Bottom Layer w10: v2(221,897) 229.81,905.81 399.94,905.81 U9.4
  Bottom Layer w80: Q2.S 277.14,1502.14 277.14,1470.86 525.15,1222.84 ; 431,957 431,1128.69 525.15,1222.84 ; Q1.S 982.69,1468.42 982.69,1284.97 920.57,1222.84 525.15,1222.84
NetC10_1: C10.1 FB1.2 P8.1 | length 156.5
  Top Layer w10: P8.1 1259.99,2688.01 1266,2682 FB1.2 1282.53,2652.5 1314.02,2621 C10.1
NetC11_1: C11.1 P8.2 R16.1 | length 191.7
  Top Layer w10: R16.1 1228.5,2673.99 P8.2 v1(1228.5,2797) v1@1228.5,2797.5
  Bottom Layer w10: v1(1228.5,2797) 1228.5,2831.99 C11.1
NetC12_1: C12.1 P8.3 R19.1 | length 213.6
  Top Layer w10: R19.1 1197,2701.5 P8.3 1197,2780 1192,2785 v1(1192,2795)
  Bottom Layer w10: C12.1 1168.5,2818.5 v1(1192,2795)
NetC13_1: C13.1 FB1.1 U13.12 | length 537.1
  Top Layer w10: v1(1266,2550) FB1.1
  Bottom Layer w10: C13.1 970,2420.5 U13.12 1187.5,2420.5 1201,2434 1201,2513 1180.5,2533.5 1180.5,2560.98 1196.02,2576.5 1217.98,2576.5 1244.48,2550 v1(1266,2550)
NetC14_1: C14.1 U13.16 | length 67.6
  Top Layer w10: C14.1 1069.5,2547 v1(1109,2547)
  Bottom Layer w10: U13.16 1108.51,2546.51 v1(1109,2547)
NetC18_1: C18.1 C33.1 U5.3 U14.2 | length 425.4
  Bottom Layer w10: 2824,1257 2835.01,1268.01 C33.1 2854,1328.01 2854,1478.5 C18.1 2842.5,1568.5 U5.3
NetC25_1: C25.1 U9.14 | length 208.7
  Bottom Layer w10: U9.14 94.06,1008.19 111.19,1008.19 125.14,1022.14 125.14,1153.65 C25.1
NetC27_1: C27.1 U9.11 | length 215.7
  Bottom Layer w10: U9.11 94.06,805.81 111.19,805.81 125.14,791.86 125.14,653.35 C27.1
NetC28_1: C28.1 U11.11 | length 90.5
  Bottom Layer w15: U11.11 1878.5,809.36 C28.1
NetC32_1: C32.1 R25.2 U12.1 | length 174.4
  Top Layer w10: v1(2067,964) 2067,960.14 U12.1 2114.5,942.17 R25.2
  Bottom Layer w10: C32.1 2038,935 v1(2067,964)
NetC32_2: C32.2 D3.A D4.A U12.2 U12.3 | length 713.2
  Top Layer w10: v1(2066,1039) 2025.48,1039 2012.98,1051.5 1989.05,1051.5 1950.63,1013.08 1950.63,862.63 D4.A 2058.4,811.26 U12.3 ; U12.2 U12.3 ; v1(2138,853) 2100.14,853 U12.3
  Bottom Layer w10: C32.2 2132.5,858.5 v1(2138,853) ; D3.A 2057.26,1047.74 v1(2066,1039)
NetJ1_1: J1.1 R11.1 | length 78.3
  Bottom Layer w10: R11.1 1906.5,2395.5 J1.1
NetJ1_2: J1.2 SBUS1.1 SBUS2.1 U3.7 | length 643.2
  Top Layer w10: SBUS2.1 1707,2569 U3.7 1732.96,2502.53 1732.96,2487.36 1747.14,2473.18 1816.86,2473.18 1830.81,2487.13 ; J1.2 1839.94,2478 1830.81,2487.13 ; SBUS1.1 1830.81,2556.81 1830.81,2487.13
NetLED1_A: LED1.A R3.2 | length 70.4
  Top Layer w10: v1@2894.48,2334.48 LED1.A
  Top Layer w20: v1(2894,2334) v1@2894.48,2334.48
  Bottom Layer w10: v1(2894,2334) R3.2@2894,2368.5
  Bottom Layer w20: R3.2 R3.2@2894,2368.5
NetLED2_A: LED2.A R4.2 | length 70.4
  Top Layer w10: LED2.A@2894,2427.48 v1(2894,2462)
  Top Layer w20: LED2.A@2894,2427.48 LED2.A
  Bottom Layer w10: R4.2 v1@2894.5,2461.5
  Bottom Layer w20: v1(2894,2462) v1@2894.5,2461.5
NetLED3_A: LED3.A R22.2 | length 50.4
  Top Layer w10: R22.2 397.48,764.02 LED3.A
NetLED4_A: LED4.A R23.2 | length 49
  Top Layer w10: LED4.A R23.2@697.48,764.02
NetLED5_A: LED5.A R24.2 | length 49
  Top Layer w10: LED5.A@1296.5,715.98 R24.2
NetLED6_A: LED6.A R26.2 | length 49
  Top Layer w10: LED6.A R26.2@997.48,764.02
NetN1_3: N1.3 P4.2 R1.2 | length 229.9
  Bottom Layer w10: P4.2 2257.26,2591.43 2302.48,2546.21 2321.13,2546.21 2328.16,2539.18 2328.16,2520.24 N1.3
NetQ1_G: Q1.G Q2.G U7.5 | length 1529.8
  Top Layer w15: U7.5 374.18,870.69 392.88,870.69 474,951.81 Q2.G 534,1450 1169,1450 Q1.G
NetQ3_G: Q3.G U8.5 | length 583.4
  Top Layer w15: U8.5 1980,1158.49 Q3.G
NetQ4_G: Q4.G Q5.G U12.5 | length 1207.7
  Top Layer w20: Q5.G Q4.G 2255.5,529.5 2255.5,824.86 2260.5,829.86 2260.5,864.05 2242.05,882.5 2199.76,882.5 U12.5
NetR10_2: R10.2 RX.A | length 76
  Top Layer w10: RX.A v1(2155,2515)
  Bottom Layer w10: R10.2 v1@2154,2516
NetR11_2: R11.2 SBUS1.2 SBUS2.2 U3.6 | length 734.2
  Top Layer w10: SBUS2.2 1537.26,2663.23 1583.53,2709.5 1648.47,2709.5 1730.81,2627.16 1730.81,2554.68 U3.6 1757,2561.74 SBUS1.2
  Bottom Layer w10: R11.2 1853,2657.74 SBUS1.2
NetR16_2: R16.2 U13.9 | length 332.8
  Top Layer w10: v1@1207,2548 v1(1207,2550) R16.2
  Bottom Layer w10: U13.9 1171.5,2345.5 1207,2381 1207,2415.96 1218,2426.96 1218,2531.04 1207,2542.04 v1(1207,2550)
NetR17_2: R17.2 RX1.A | length 69.5
  Top Layer w10: R17.2 990.5,2651.98 RX1.A
NetR18_2: R18.2 TX1.A | length 117.1
  Top Layer w10: v1(1319,2728) 1320.52,2726.48 TX1.A
  Bottom Layer w10: v1(1319,2728) R18.2@1377.5,2728
NetR19_2: R19.2 U13.8 | length 360.7
  Top Layer w10: R19.2 1139,2580.5 1139,2430 1224,2345 v1(1236,2345) ; v1@1239,2348 v1@1242,2345
  Bottom Layer w10: v1(1236,2345) U13.8@1296.99,2345
NetR27_2: R27.2 TX.A | length 74
  Top Layer w10: TX.A v1@2155,2399
  Bottom Layer w10: R27.2@2118.5,2398 v1(2156,2398)
NetR28_1: R28.1 TE.C | length 77
  Top Layer w10: TE.C v1(2157,2458)
  Bottom Layer w10: R28.1 v1@2156,2457
NetRX1_C: RX1.C U13.14 | length 332.4
  Top Layer w10: RX1.C 1073.48,2707.48 v1(1074,2708)
  Bottom Layer w10: v1(1074,2708) 1067,2701 1067,2542.12 1053.2,2528.32 1053.2,2482.8 1065.5,2470.5 U13.14
NetTX1_C: TX1.C U13.7 | length 490.3
  Top Layer w10: v1(1235,2384) 1235,2481.52 1292.5,2539.02 1292.5,2550.98 1331.82,2590.3 1409.15,2590.3 1416.18,2597.33 1416.18,2644.67 1390.85,2670 TX1.C
  Bottom Layer w10: v1(1235,2384) 1248.5,2370.5 U13.7
NRST: C5.1 C14.2 P7.5 R6.2 R29.2 S1.B U4.7 | length 3473.8
  Top Layer w10: P7.5 614.6,1875 656.6,1917 732.56,1917 749.56,1934 861.92,1934 989.5,2061.58 ; v1(967,2071) 980.08,2071 989.5,2061.58 ; R29.2 1005.5,2436.5 989.5,2420.5 989.5,2061.58 ; v1(1016,1955) 1041.5,1929.5 1236.52,1929.5 1267.32,1960.3 1380.57,1960.3 1391.06,1949.81 1391.06,1926.46 U4.7 1392.84,1959.68 1386.5,1966.02 1386.5,1987.98 1402.02,2003.5 1457.98,2003.5 1573.58,1887.89 2898.98,1887.89 2944.09,1933 v1(2898,1933) ; v1(2894,2244) 2946.08,2244 S1.B@2946.58,2243.5
  Top Layer w15: R29.2 C14.2
  Bottom Layer w10: v1(967,2071) 1016,2022 v1(1016,1955) ; R6.2 2893,2245 v1(2894,2244) ; C5.1 2898,1967.5 v1(2898,1933)
PWR_ON: P6.2 U4.20 | length 1354.8
  Top Layer w10: v1(1493,2096) 1518.53,2121.53 U4.20
  Bottom Layer w10: P6.2 443.26,2660.77 943.53,2160.5 1177.02,2160.5 1241.52,2096 v1(1493,2096)
RAIL+: BAT1.+ C17.1 C21.1 C24.2 C30.1 C31.1@2520.57,1106 C31.2@1593,842.91 D2.C Q1.D Q2.D Q3.D Q4.D Q5.D R25.1 R26.1 U5.1 U6.1 U7.1 U8.1 U12.6 | length 10489
  Top Layer w10: C24.2 143.6,979.09 U7.1 ; R26.1 965,733.5 BAT1.+ ; R25.1 2177.5,942.17 U12.6 2228.26,927.4 2356.45,799.21 2356.45,428.55 2310,382.1 Q4.D
  Top Layer w15: U7.1 371.64,1207.13 Q2.D 404.78,1510 453.72,1558.95 1044.55,1558.95 1093.5,1510 Q1.D ; C30.1@1386.2,849.2 1392.49,842.91 1593,842.91 1630.4,805.51 U8.1
  Bottom Layer w10: U5.1 2643,1490.5 C17.1
  Bottom Layer w50: D2.C 2283.65,542.62 2243.55,502.52 2243.55,439.09 Q4.D ; C31.1@2520.57,1106 2520.57,1446.57 U5.1 2643,1569.93 2948,1874.93 2948,2604.72 2697.7,2855.02 2697.7,2905.44 2667.65,2935.5 C21.1 U6.1@2554.17,2935.5
  Bottom Layer w95: Q2.D 371.64,1605.64 375,1609 1129,1609 ; BAT1.+ BAT1.+@1031,540 ; BAT1.+@1021,545 1188,712 ; Q1.D 1126.64,1606.64 1129,1609 ; 1198,707 1340,707 1470.19,576.81 ; Q5.D Q4.D 2323.41,386.05 2415.11,386.05 2604.66,575.6 2604.66,674.33 2343,935.99 2343,1436 2170,1609 1884,1609 ; Q5.D@1608.41,386.05 1631.84,386.05 ; Q3.D 1884,1516.36 1884,1609 ; 1129,1609 1884,1609
SHORE+: C29.1 D3.C Q4.S Q5.S R24.1 SP1.+ U12.4 | length 1338.5
  Top Layer w10: R24.1 1233.5,762.48 1260.27,735.72 1260.27,544.73 SP1.+ ; U12.4 2227.4,852.6 v1(2229,851)
  Top Layer w15: Q4.S 2310,303.41 2419,412.41 v1(2419,490)
  Bottom Layer w10: C29.1 2177.5,799.5 v1(2229,851) 2214.74,865.26 D3.C
  Bottom Layer w15: C29.1 2237.72,728.78 2338.86,728.78 2377,690.64 2377,532 v1(2419,490) v1@2423,486
SUBBUS_RXI: RX.C U3.1 U4.22 | length 763.7
  Top Layer w10: U4.22 1552.1,2159.12 1579.81,2159.12 1585.43,2153.5 1612.98,2153.5 1657,2197.52 U3.1 1679.5,2362.01 1679.5,2408.98 1706.52,2436 1941.4,2436 2020.4,2515 RX.C
SUBBUS_TE: R9.1 TE.A U3.3 U4.25 | length 805.1
  Top Layer w10: U4.25 1517.68,2259.32 v1(1518,2259) ; U3.3 v1(1757,2398) 1844.6,2398 1906.6,2336 1941.4,2336 2053.52,2448.12 TE.A
  Bottom Layer w10: v1(1518,2259) 1630.5,2371.5 1716.98,2371.5 1743.48,2398 v1(1757,2398) 1757,2433.5 R9.1
SUBBUS_TXO: TX.C U3.4 U4.21 | length 683.8
  Top Layer w10: U4.21 1552.1,2139.43 1575.46,2139.43 1583.89,2131 1681,2131 1807,2257 U3.4 1879.05,2339.51 1899.56,2319 1948.44,2319 2028.44,2399 TX.C
SWCLK: P7.2 U4.37 | length 489.9
  Top Layer w10: P7.2 874,1898 1176.27,2200.27 U4.37
SWDIO: P7.4 U4.34 | length 813
  Top Layer w10: P7.4 714.6,1875 756.6,1917 856.6,1917 868.96,1917 1175.66,2223.7 1301.83,2223.7 1314.1,2235.97 U4.34
TEMP_HOTSWAP: SP.1 U4.14 | length 2046.3
  Top Layer w10: U4.14 1594.58,2003.42 v1(1595,2003) ; v1(1735,1845) 2471.17,1108.83 2471.17,1056.6 2895,632.77 SP.1
  Bottom Layer w10: v1(1595,2003) 1595,1985 v1(1735,1845)
TEMP_MOTFET: P3.1 U4.10 | length 1446.1
  Top Layer w10: v1(1449,1872) 1451.9,1874.9 U4.10
  Bottom Layer w10: P3.1 163,1872 411.6,1872 457.6,1918 1019,1918 1065,1872 1172.48,1872 1182.98,1882.5 1268.02,1882.5 1278.52,1872 v1(1449,1872)
U3V3: C15.1 R17.1 R18.1 U13.3 U13.10 U13.11 | length 1660
  Top Layer w10: R17.1 v1(1100,2608)
  Bottom Layer w10: U13.11 U13.10 1108.01,2370 1029.48,2370 1026.98,2367.5 935.65,2367.5 923.3,2379.85 923.3,2492.15 930.33,2499.18 988.18,2499.18 1047.5,2558.5 1047.5,2718.98 1063.02,2734.5 1084.98,2734.5 1100.5,2718.98 1100.5,2608.5 v1(1100,2608) 1114.5,2593.5 1225.02,2593.5 1226.52,2592 1280,2592 1293.83,2605.83 1293.83,2613.66 1346.68,2666.5 R18.1 1413.32,2666.5 1520.17,2559.66 1520.17,2510.34 1513.14,2503.31 1476.82,2503.31 C15.1 1370.02,2472.5 1367.52,2470 1297.99,2470 U13.3
pads on no net: P5.1 P5.2 P7.6 P8.4 Q1.0 Q2.0 Q3.0 Q4.0 Q5.0 U2.1 U2.4 U4.1 U4.2 U4.3 U4.4 U4.6 U4.13 U4.15 U4.16 U4.17 U4.18 U4.19 U4.26 U4.29 U4.38 U4.41 U4.45 U4.46 U7.6 U7.7 U7.8 U8.6 U8.7 U8.8 U9.10 U9.13 U11.10 U11.13 U13.15

## Polygon pours and split planes (outlines as drawn)
3V3 on Bottom Layer "16.8 computer dna" (solid, pour order 39): 2681,1305 2831,1305 2831,1378 2591,1378 2591,1343 2681,1343
GND on Bottom Layer "16.8 computer dna" (solid, pour order 38): 2105,2705 2075,2705 2075,2975 2135.16,2975 2135.16,2705.16 2135,2705
RAIL+ on Bottom Layer "16.8 computer dna" (solid, remove dead copper, pour order 32): 2300,411.43 2300,440 2230,520 1690,520 1685,520 1595,417.14 1645,360 1875,360 2240,360 2260,382.86
SHORE+ on Bottom Layer "16.8 computer dna" (solid, remove dead copper, pour order 30): 1185,485 1185,440 1450,175 1455,170 2265,170 2275,170 2355,250 2310,295 1545,295 1510,295 1310,495
RAIL+ on Bottom Layer "16.8 computer dna" (solid, remove dead copper, pour order 33): 2314,362 2314,353 2429,238 2444,223 2581,223 2581,226 2817,462 2817,731 2817,741 2535,1023 2535,1518 2535,1524 2255,1804 2242,1817 559,1817 522,1817 329,1624 335,1618 1240,1618 2047,1618 2060,1631 2082,1609 2170,1609 2178,1609 2336,1451 2343,1444 2343,954 2343,942 2596,689 2598,687 2598,566 2594,566 2431,403 2400.64,372.64 2299,372.64
MT_PW on Bottom Layer "16.8 computer dna" (solid, remove dead copper, pour order 34): 403,1126 400,1126 187,1339 184,1342 184,1424 184,1424.72 269.28,1510 269.28,1496.72 369,1397 533,1233 533,1229 531.31,1229 433.31,1131
MT_PW on Bottom Layer "16.8 computer dna" (solid, remove dead copper, pour order 35): 1024.28,1510 1130,1404.28 1130,1350 1130,1236 988,1094 987,1093 450,1093 464,1107 464,1182 536,1182 584,1230 586,1228 929,1228 929,1245 1005,1321 1009,1325 1009,1493 1009,1494.72 1024.28,1510
RAIL+ on Bottom Layer "16.8 computer dna" (solid, remove dead copper, pour order 36): 371.64,1510 288,1593.64 288,1663 288,1686 408,1806 419,1817 608,1817 608,1741 597,1730 494,1627 494,1582 472,1582 395,1505
MOTORS on Bottom Layer "16.8 computer dna" (solid, remove dead copper, pour order 37): 432,490 541,599 541,788 541,807 457,891 448,882 426.13,882 426.13,512.13 412,498
COMP on Bottom Layer "16.8 computer dna" (solid, remove dead copper, pour order 40): 665,540 793,668 793,687 793,851 837,895 1348,895 1389,895 1590,1096 1591,1095 1678,1095 1694,1095 1754,1155 1750,1159 1750,1197 1472,1197 1440,1165 1261,986 1261,976 753,976 748,981 658,891 658,882 658,554 665,547
CM_PW on Bottom Layer "16.8 computer dna" (solid, remove dead copper, pour order 41): 1960,1186.13 1960,1268 1960,1271 1858,1373 1824,1407 1824,1509 1824,1515 1794,1545 1772,1523 1772,1330 1772,1307 1819,1260 1842,1237 1842,1197 1949.13,1197 1960,1186.13
CM_PW on Bottom Layer "16.8 computer dna" (solid, remove dead copper, pour order 42): 1750,1536 1684,1470 1684,1398 1684,1342 1808,1218 1811,1215 1843,1215 1843,1344 1824,1363 1775.28,1411.72 1775.28,1510
MT_PW on Bottom Layer "16.8 computer dna" (solid, remove dead copper, pour order 43): 461.93,932 535.46,1000 540.86,1005 540.86,1079 540.86,1082 556,1096 486.8,1096 451.11,1129 423,1103 423,996 423,950 445.71,929
RAIL+ on Bottom Layer "16.8 computer dna" (solid, remove dead copper, pour order 44): 1385.28,597 1385.28,520 1388.14,517 1570.49,326 1592.44,326 1637.31,326 1645.91,335 1665,355 1665,396 1633.5,396 1601.04,430 1510.34,525 1510.34,582 1503.66,582 1370,722 1385.28,706 1385.28,584
RAIL+ on Bottom Layer "16.8 computer dna" (solid, remove dead copper, pour order 45): 1553.22,474.78 1553.22,715.78 1476,793 1428,841 1169,841 1129,841 897,609 962,609 1037,534 1170,667 1193,667 1240,667 1263,690 1270,683 1327,683 1327,678 1439,566 1518,487 1518,457 1535.45,457 1553.22,474.78
RAIL+ on Bottom Layer "16.8 computer dna" (solid, remove dead copper, pour order 46): 2299.18,434.62 2299.8,434 2355,434 2355,410 2354,409 2327,382 2301,382 2270,382 2248,404 2281.52,437.52 2292.17,437.52
RAIL+ on Bottom Layer "16.8 computer dna" (solid, remove dead copper, pour order 47): 2283,325 2371,325 2373,327 2373,357 2339,357 2332,350 2284,350 2284,331 2278,325
SHORE+ on Bottom Layer "16.8 computer dna" (solid, remove dead copper, pour order 48): 2355,250 2355,297 2339,313 2334,318 1563,318 1560,318 1359,519 1289,449 1272,449 1272,447 1405,314 1470,249 1552,249 2316,249 2319,246 2323,250 2355,250
CM_PW on Bottom Layer "16.8 computer dna" (solid, pour order 31): 1813,1510 1829,1494 1829,1463 1829,1441 1971,1299 2006,1264 2006,1154 2006,1151 2003,1148 1912,1148 1912,1182 1870,1224 1774,1320 1774,1359 1774,1515 1770,1519
COMP on Bottom Layer "16.8 computer dna" (solid, pour order 49): 633,586 579,640 579,931 579,951 676,1048 693,1065 1211,1065 1214,1065 1393,1244 1396,1247 1598,1247 1724,1247 1757,1214 1747,1204 1747,1180 1592,1180 1568,1156 1381,969 1337,969 834,969 822,957 720,855 716,855 716,582 683,549
GND on Bottom Layer "16.8 computer dna" (solid, pour order 50): 2098.98,669.84 2039,610.93 2039,581 2184.94,581 2187,583.02 2187,618.35 2187,619.36 2118.14,687
GND on Bottom Layer "16.8 computer dna" (solid, pour order 51): 2268.16,2842 2135.16,2975 2135,2975 2105,2975 2105,2705 2135,2705 2268.16,2838.16 2268.16,2842
SHORE+ on Bottom Solder "16.8 computer dna" (solid): 2337,254 2273,190 2233,190 1825,190 1812,203 1809,206 1752,206 1736,206 1721,191 1720,192 1464,192 1462,192 1219,435 1216,438 1216,498 1334,498 1338,502 1529,311 1532,311 2297,311 2319,289 2321,287 2321,240
MOTORS on Bottom Solder "16.8 computer dna" (solid): 461,537 461,548 520,607 522,609 522,789 522,799 443,878 442,879 400,879 400,585 406,579
MT_PW on Bottom Solder "16.8 computer dna" (solid): 443,941 523,1021 523,1084 523,1093 546,1116 548,1118 957,1118 970,1118 1093,1241 1103,1251 1103,1398 1103,1409 1020,1492 1002,1510 983,1510 961,1488 961,1293 961,1288 917,1244 915,1242 546,1242 540,1242 287,1495 286,1496 262,1496 262,1483 208,1429 205,1426 205,1361 205,1350 413,1142 416,1139 416,941 441,941 445,945
RAIL+ on Bottom Solder "16.8 computer dna" (solid): 1051,509 1203,661 1203,663 1322,663 1328,657 1388,597 1388,590 1388,524 1393,519 1559,353 1559,350 1584,350 1589,345 1596,338 2358,338 2367,338 2454,251 2460,245 2547,245 2558,245 2783,470 2792,479 2792,715 2792,722 2517,997 2498,1016 2498,1508 2498,1515 2226,1787 2214,1799 441,1799 435,1799 335,1699 309,1673 309,1626 309,1599 340,1568 340,1513 395,1513 396,1514 396,1526 397,1526 454,1583 459,1588 1003,1588 1077,1588 1092,1573 1094,1571 1094,1507 1159,1507 1160,1508 1160,1551 1160,1563 1179,1582 1182,1585 1504,1585 1829,1585 1847,1567 1847,1513 1908,1513 1909,1512 1915,1518 1915,1551 1915,1567 1930,1582 1931,1583 2152,1583 2167,1583 2322,1428 2332,1418 2332,928 2332,923 2592,663 2597,658 2597,593 2597,589 2427,419 2424,416 2271,416 2257,416 2183,490 2177,496 1703,496 1700,496 1611,407 1610,408 1575,408 1572,408 1504,476 1504,708 1501,708 1401,808 1150,808 1125,808 913,596 986,523 1052,523
RAIL+ on Bottom Solder "16.8 computer dna" (solid): 1612,398 1603,398 1536,465 1528,473 1528,708 1418,818 1416,820 1157,820 1138,820 1101,783 1143,741 1298,741 1329,741 1438,632 1479,591 1479,463 1504.64,463 1595,372.64
COMP on Bottom Solder "16.8 computer dna" (solid): 703,608 767,672 767,686 767,831 767,857 767,862 822,917 831,926 1341,926 1357,926 1577,1146 1583,1152 1752,1152 1752,1213 1750,1211 1747,1211 1746,1211 1723,1234 1722,1235 1428,1235 1425,1235 1230,1040 730,1040 716,1040 613,937 596,920 596,671 596,643 625,614 627,612 708,612
CM_PW on Bottom Solder "16.8 computer dna" (solid): 1802,1505 1802,1496 1816,1482 1816,1427 1816,1418 1979,1255 1986,1248 1986,1185 1821,1185 1821,1232 1821,1238 1723,1336 1700,1359 1700,1455 1700,1468 1756,1524 1777,1503 1794,1503
3V3 on Internal Plane 1 (split plane): 2979.9,20.1 20.1,20.1 20.1,2979.9 2979.9,2979.9
GND on Internal Plane 2 (split plane): 2979.9,20.1 20.1,20.1 20.1,2979.9 2979.9,2979.9

## Other copper
Top Layer:
  text "Andy Gray" at 59,271 h29.53 r90
  text "MIL SEP '13" at 116,253 h29.53 r90

## Silkscreen, mask and mechanical layers (free items; w line width, h text height)
Top Overlay:
  text "FAN" at 2668,2452 h40 r90
  text "HALL" at 454,2420 h40 r90
  text "KILL" at 778,2418 h40 r90
  text "2" at 2972,2415 h40 r90
  text "1" at 2972,2364 h40 r90
  text "BUZZER" at 2354,2335 h40 r90
  text "STM32F103C8T7" at 1079,2325 h40
  text "TERM" at 1946,2172 h40 r90
  text "RESET" at 2704,2012 h40 r90
  text "MT TEMP" at 307,1763 h40 r90
  text "SP" at 2900,688 h40 r90
  text "TEMP" at 2960,684 h40 r90
  text "CMPTRS" at 574,235 h40 r90
  text "MOTORS" at 267,232 h40 r90
  text "SPWRIN" at 1175,232 h40 r90
  text "BATTIN" at 872,229 h40 r90

## Dimensions
0,0 to 3000,0 on Keep-Out Layer
0,0 to 0,3000 on Keep-Out Layer